# Altium PCB PCBControl.PcbDoc
Units mm, origin at the board's own origin, x right, y up, seen from the top; angles counter-clockwise.
Board outline 154.42 x 78.27 mm, 2 copper layers (Top Layer, Bottom Layer); 60 components, 54 nets, 169 pads, 0 vias.
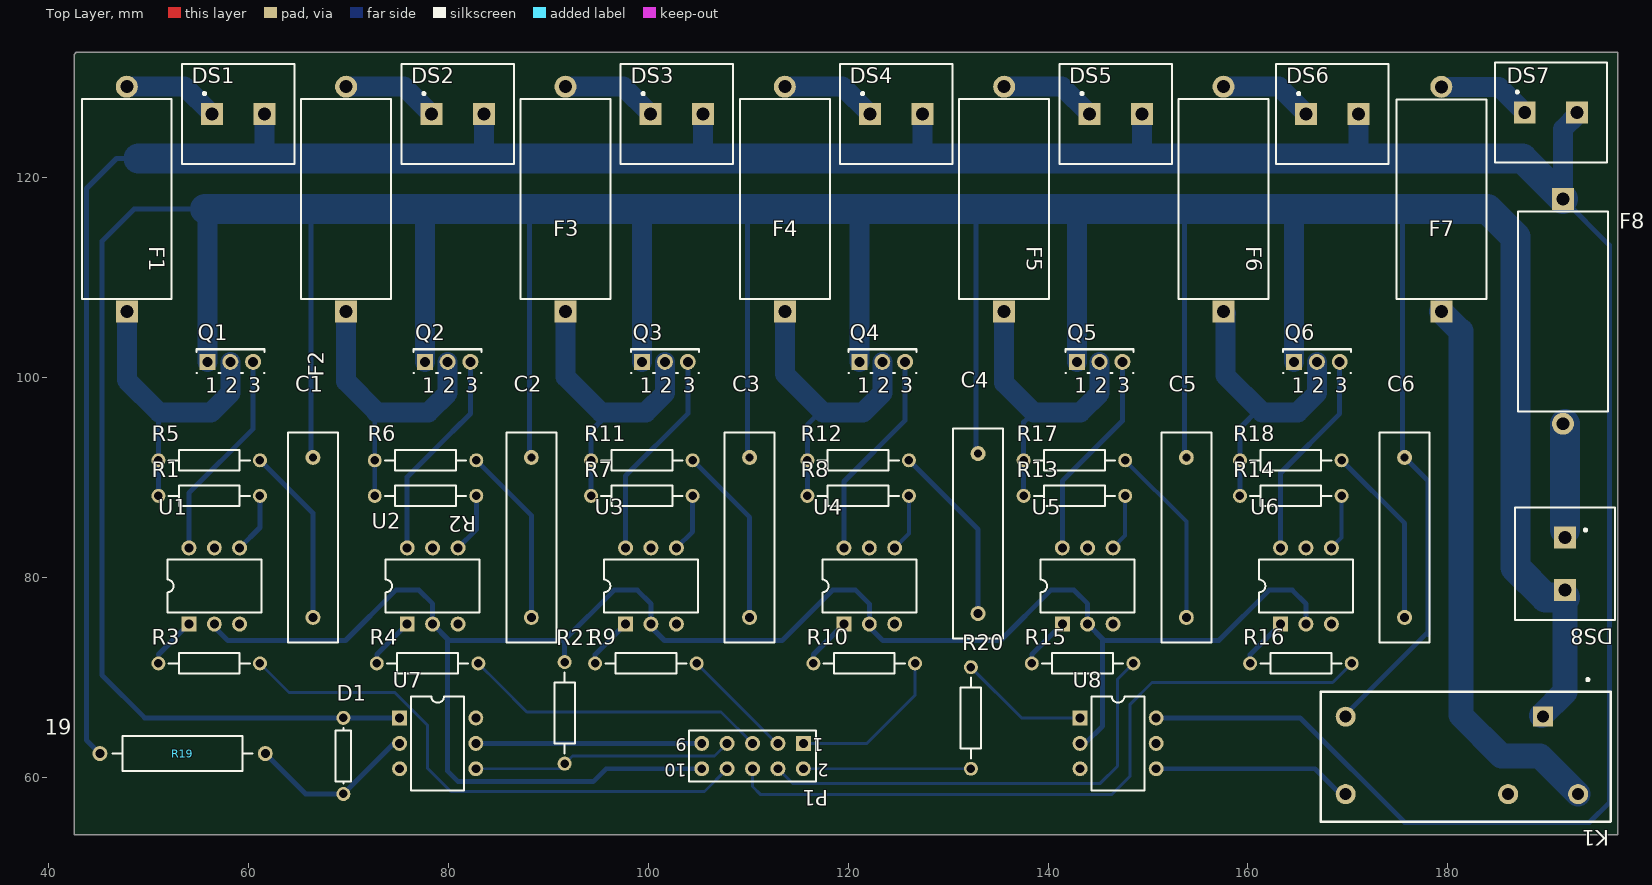
[diagram p0: Top Layer view]
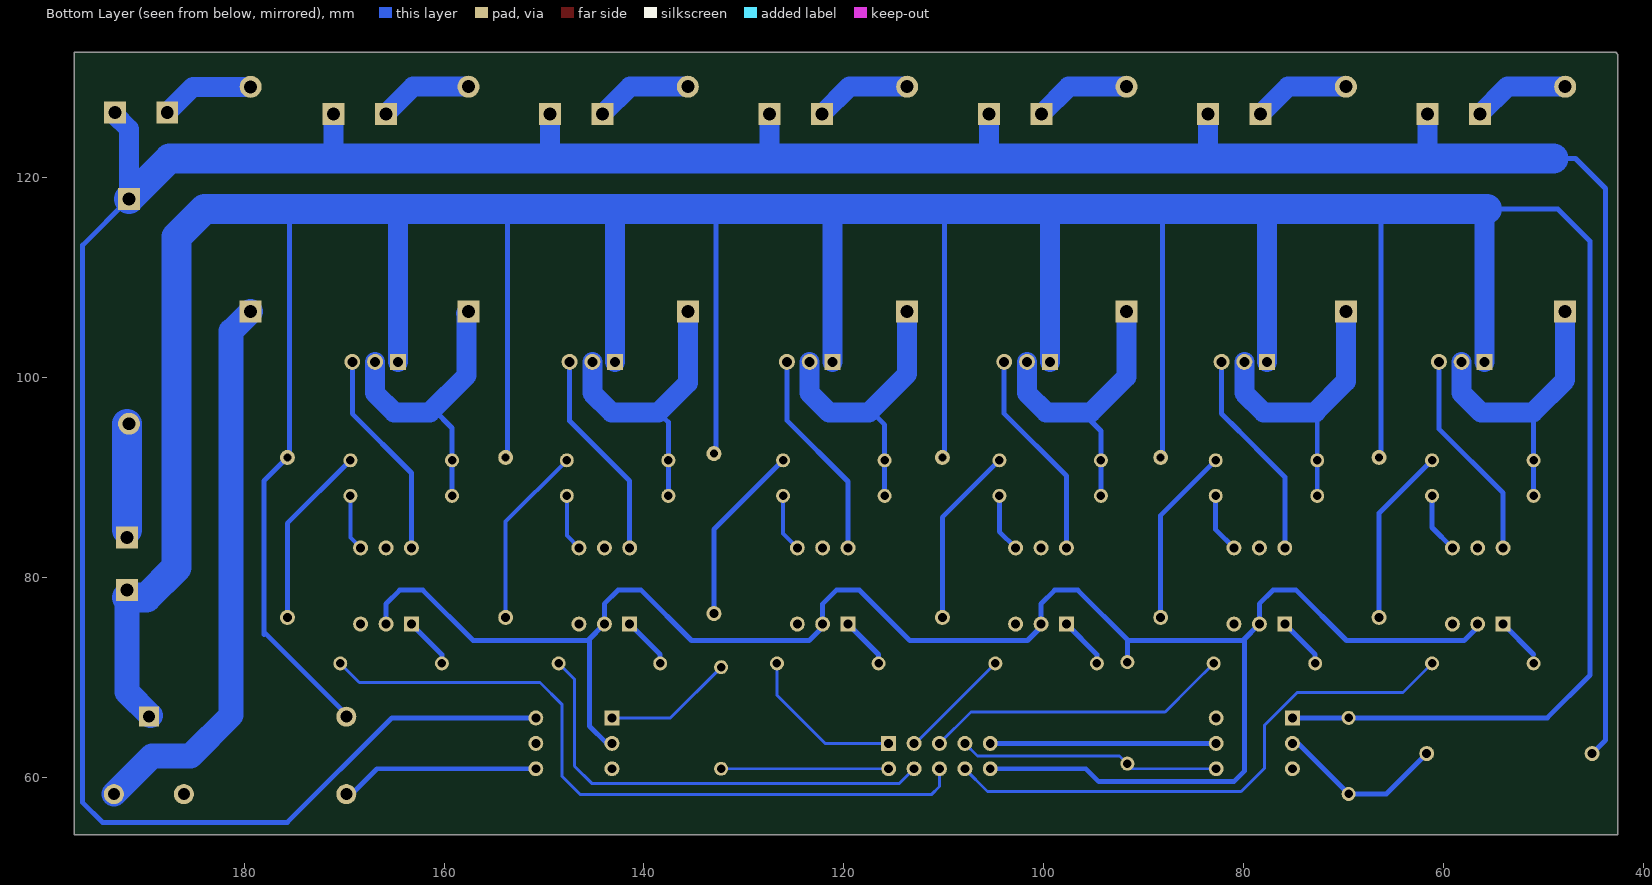
[diagram p1: Bottom Layer view, seen from below]

## Layer stack, top to bottom
Top Layer: signal copper 0.0356
Dielectric: dielectric 0.32, FR-4, Dk 4.8
Bottom Layer: signal copper 0.0356

## Board outline
42.575,132.3 42.575,54.25 197,54.25 197,132.525 42.775,132.525

## Design rules (kind name [scope] priority, off if disabled: settings)
Clearance [All] p1: gap=0.254
ComponentClearance [All] p1: gap=0.254 collisioncheckmode=3 verticalgap=0.254
PolygonConnect [All] p1: connectstyle=Relief reliefconductorwidth=0.254 reliefentries=4 polygonreliefangle="90 Angle"
RoutingVias [All] p1: holewidth=0.711 width=1.27 viastyle="Through Hole" minholewidth=0.711 minwidth=1.27 maxholewidth=1.25 maxwidth=2.5
SolderMaskExpansion [All] p1: expansion=0.102
TestPointUsage [All] p1: valid=0 allowmultiple=FALSE
Testpoint [All] p1: side=15 testpointundercomponent=TRUE minsize=1.016 maxsize=2.54 preferedsize=1.524 minholesize=0 maxholesize=1.016 preferedholesize=0.813 testpointgrid=0.025 style=1023 order=0-112345678
Width [All] p1: maxlimit=3 minlimit=0.254 preferedwidth=0.3 toplayer_minwidth=0.3 toplayer_prefwidth=0.5 bottomlayer_minwidth=0.3 bottomlayer_prefwidth=0.5 minimp=50.000000 maximp=50.000000 favimp=50.000000
18 further rules are at their usual default settings.

## Components (designator, comment, footprint, x,y, rotation, side; value= is the part's Value field where it differs from the comment)
C1 "Cap" RAD-0.3 66.458,91.984 r270 top
C2 "Cap" RAD-0.3 88.302,91.984 r270 top
C3 "Cap" RAD-0.3 110.146,91.984 r270 top
C4 "Cap" RAD-0.3 133.006,92.365 r270 top
C5 "Cap" RAD-0.3 153.834,91.984 r270 top
C6 "Cap" RAD-0.3 175.678,91.984 r270 top
D1 "Diode" AXIAL-0.3 69.5,62.125 r90 top
DS1 "Lamp Neon" PIN2 55.608,126.339 r0 top
DS2 "Lamp Neon" PIN2 77.554,126.339 r0 top
DS3 "Lamp Neon" PIN2 99.499,126.339 r0 top
DS4 "Lamp Neon" PIN2 121.445,126.339 r0 top
DS5 "Lamp Neon" PIN2 143.39,126.339 r0 top
DS6 "Lamp Neon" PIN2 165.082,126.339 r0 top
DS7 "Lamp Neon" PIN2 186.944,126.492 r0 top
DS8 "Lamp" PIN2 191.716,84.716 r270 top
F1 "Fuse 2" PIN-W2/E2.8 47.831,106.573 r90 top
F2 "Fuse 2" PIN-W2/E2.8 69.777,106.573 r90 top
F3 "Fuse 2" PIN-W2/E2.8 91.722,106.573 r90 top
F4 "Fuse 2" PIN-W2/E2.8 113.668,106.573 r90 top
F5 "Fuse 2" PIN-W2/E2.8 135.613,106.573 r90 top
F6 "Fuse 2" PIN-W2/E2.8 157.559,106.573 r90 top
F7 "Fuse 2" PIN-W2/E2.8 179.348,106.565 r90 top
F8 "Fuse 2" PIN-W2/E2.8 191.516,117.856 r270 top
K1 "Relay" MODULE5B 180.032,58.3 r180 top
P1 "Header 5X2" HDR2X5 115.516,63.38 r180 top
Q1 "Triac" 369-03 58.193,101.551 r0 top
Q2 "Triac" 369-03 79.935,101.551 r0 top
Q3 "Triac" 369-03 101.678,101.551 r0 top
Q4 "Triac" 369-03 123.42,101.551 r0 top
Q5 "Triac" 369-03 145.163,101.551 r0 top
Q6 "Triac" 369-03 166.905,101.551 r0 top
R1 "Res2" AXIAL-0.4 56.08,88.145 r180 top
R2 "Res2" AXIAL-0.4 77.721,88.145 r180 top
R3 "Res2" AXIAL-0.4 56.08,71.381 r180 top
R4 "Res2" AXIAL-0.4 77.924,71.381 r180 top
R5 "Res2" AXIAL-0.4 56.08,91.701 r180 top
R6 "Res2" AXIAL-0.4 77.721,91.701 r180 top
R7 "Res2" AXIAL-0.4 99.362,88.145 r180 top
R8 "Res2" AXIAL-0.4 121.002,88.145 r180 top
R9 "Res2" AXIAL-0.4 99.768,71.381 r180 top
R10 "Res2" AXIAL-0.4 121.612,71.381 r180 top
R11 "Res2" AXIAL-0.4 99.362,91.701 r180 top
R12 "Res2" AXIAL-0.4 121.002,91.701 r180 top
R13 "Res2" AXIAL-0.4 142.643,88.145 r180 top
R14 "Res2" AXIAL-0.4 164.284,88.145 r180 top
R15 "Res2" AXIAL-0.4 143.456,71.381 r180 top
R16 "Res2" AXIAL-0.4 165.3,71.381 r180 top
R17 "Res2" AXIAL-0.4 142.643,91.701 r180 top
R18 "Res2" AXIAL-0.4 164.284,91.701 r180 top
R19 "Res2" RESIS1W 43.888,62.364 r180 top
R20 "Res2" AXIAL-0.4 132.28,65.92 r90 top
R21 "Res2" AXIAL-0.4 91.64,66.428 r270 top
U1 "Opto TRIAC" DIP-6 56.588,79.128 r0 top
U2 "Opto TRIAC" DIP-6 78.432,79.128 r0 top
U3 "Opto TRIAC" DIP-6 100.276,79.128 r0 top
U4 "Opto TRIAC" DIP-6 122.12,79.128 r0 top
U5 "Opto TRIAC" DIP-6 143.964,79.128 r0 top
U6 "Opto TRIAC" DIP-6 165.808,79.128 r0 top
U7 "Optoisolator1" DIP-6 78.94,63.38 r270 top
U8 "Opto TRIAC" DIP-6 147.012,63.38 r270 top

## Footprints (in the part's own frame and the unit in brackets; to place one, negate y for a bottom-side part, rotate by r counter-clockwise, add the part's x,y. Pads: shape width x height; smd on the part's side, far side on the other; paste and mask are expansions set on the pad)
369-03 [mm] "TO, Thru-Hole, Vertical, Heatsink Mounted; 3 In-Line Leads; Pitch 2.28 mm"
  rect 1.6x1.6 hole 1: 1(-2.28,0)
  round 1.6 hole 1: 2(0,0) 3(2.28,0)
  silkscreen extent -3.4,-1.1 3.4,1.3
AXIAL-0.3 [mm] "Resistor; 2 Leads"
  round 1.4 hole 0.85: 1(-3.81,0) 2(3.81,0)
  silkscreen extent -2.77,-0.76 2.77,0.76
AXIAL-0.4 [mm] "Resistor; 2 Leads"
  round 1.4 hole 0.85: 1(-5.08,0) 2(5.08,0)
  silkscreen extent -4.06,-1.02 4.06,1.02
DIP-6 [mm] "DIP; 6 Leads; Row Spacing 7.62 mm; Pitch 2.54 mm"
  rect 1.5x1.5 hole 0.9: 1(-2.54,-3.81)
  round 1.5 hole 0.9: 2(0,-3.81) 3(2.54,-3.81) 4(2.54,3.81) 5(0,3.81) 6(-2.54,3.81)
  silkscreen extent -4.7,-2.65 4.7,2.65
HDR2X5 [mm] "Connector; Header; 5x2 Position"
  rect 1.5x1.5 hole 0.9: 1(0,0)
  round 1.5 hole 0.9: 2(0,2.54) 3(2.54,0) 4(2.54,2.54) 5(5.08,0) 6(5.08,2.54) 7(7.62,0) 8(7.62,2.54) 9(10.16,0) 10(10.16,2.54)
  silkscreen extent -1.27,-1.27 11.43,3.81
MODULE5B [mm] "DIP; 5 Round Pins; Row Space 15.24 mm; Pitch 2.54 mm"
  rect 2x2 hole 1.2: 1(-9.5,-7.75)
  round 2 hole 1.2: 2(-6,0) 3(-13,0) 4(10.25,0) 5(10.25,-7.75)
  silkscreen extent -16.25,-11.57 12.75,2.75
PIN2 [mm]
  rect 2.2x2.2 hole 1.3: 1(0.75,0) 2(6,0)
  silkscreen extent -2.25,-5 9,5
PIN-W2/E2.8 [mm] "Fuse; 2 Leads"
  rect 2.2x2.2 hole 1.3: 1(0,0)
  round 2.2 hole 1.3: 2(22.5,0)
  silkscreen extent 1.25,-4.5 21.25,4.5
RAD-0.3 [mm] "Capacitor; 2 Leads"
  round 1.5 hole 0.8: 1(0,0)
  round 1.5 hole 0.9: 2(16,0)
  silkscreen extent -2.5,-2.5 18.5,2.5
RESIS1W [mm]
  round 1.5 hole 0.9: 1(-17.8,0) 2(-1.25,0)
  silkscreen extent -16.5,-1.75 -2.5,1.75

## Part data
C1 C2 C3 C4 C5 C6: "Capacitor"
D1: "Default Diode"
DS1 DS2 DS3 DS4 DS5 DS6 DS7: "Neon Lamp"
DS8: "Incandescent Bulb"
F1 F2 F3 F4 F5 F6 F7 F8: "Fuse"
K1: "SPDT Relay"
P1: "Header, 5-Pin, Dual row"
Q1 Q2 Q3 Q4 Q5 Q6: "Silicon Bidirectional Triode Thyristor"
R1 R2 R3 R4 R5 R6 R7 R8 R9 R10 R11 R12 R13 R14 R15 R16 R17 R18 R19 R20 R21: "Resistor"
U1 U2 U3 U4 U5 U6 U8: "Opto-Triac"
U7: "4-Pin Phototransistor Optocoupler"

## Nets (pads, with @x,y where several pads share a name; then routed paths per layer and width w, separated by ;. In a path a pad name is that pad's centre, name@x,y a point inside that pad or via, vN(x,y) a via of type N, cw(c..) or ccw(c..) an arc to the next point about the centre after c; other vN are vias at no path point)
DETFASE: P1.7 R21.2 U7.4 | length 25.5
  Bottom Layer w0.3: U7.4 91.132,60.84 ; R21.2 92.417,62.125 106.641,62.125 P1.7
FASE: DS1.2 DS2.2 DS3.2 DS4.2 DS5.2 DS6.2 DS7.2 F8.1 R19.2 U8.6 | length 355.6
  Bottom Layer w0.5: R19.2 43.8,63.702 43.8,118.9 46.8,121.9 49,121.9 ; U8.6 165.23,65.92 175.675,55.475 194.175,55.475 196.15,57.45 196.15,113.222 F8.1
  Bottom Layer w2: 61.608,121.933 DS1.2 ; 83.525,121.9 83.554,121.929 DS2.2 ; 105.499,122.026 DS3.2 ; 127.445,122.03 DS4.2 ; 149.39,122.065 DS5.2 ; 171.082,122.018 DS6.2 ; F8.1 191.516,124.841 DS7.2@192.95,126.275
  Bottom Layer w3: 49,121.9 187.472,121.9 F8.1
GND: P1.10 R21.1 U1.2 U2.2 U3.2 U4.2 U5.2 U6.2 U8.2 | length 188.5
  Bottom Layer w0.5: U1.2@56.588,75.03 57.943,73.675 69.718,73.675 74.743,78.7 77.068,78.7 78.432,77.336 U2.2 80.075,73.675 91.562,73.675 96.587,78.7 98.912,78.7 100.276,77.336 U3.2 ; 79.9,73.85 79.9,60.625 80.979,59.546 94.496,59.546 95.79,60.84 P1.10 ; R21.1 91.64,73.597 ; U3.2@100.276,75.03 101.631,73.675 113.406,73.675 118.431,78.7 120.756,78.7 122.12,77.336 U4.2 ; U4.2@122.12,75.03 123.475,73.675 135.25,73.675 140.275,78.7 142.6,78.7 143.964,77.336 U5.2 145.607,73.675 157.094,73.675 162.119,78.7 164.444,78.7 165.808,77.336 U6.2 ; U8.2@143.73,63.38 145.45,65.1 145.45,73.832
NetC1_2: C1.2 R5.1 | length 17.9
  Bottom Layer w0.5: R5.1 66.458,86.403 C1.2
NetC2_2: C2.2 R6.1 | length 18
  Bottom Layer w0.5: R6.1 88.302,86.2 C2.2
NetC3_2: C3.2 R11.1 | length 18.1
  Bottom Layer w0.5: R11.1 110.146,85.997 C3.2
NetC4_2: C4.2 R12.1 | length 18.3
  Bottom Layer w0.4: R12.1@125.93,91.955 R12.1@126.057,91.955
  Bottom Layer w0.5: R12.1 133.006,84.777 C4.2
NetC5_2: C5.2 R17.1 | length 18.2
  Bottom Layer w0.4: R17.1 153.834,85.59 C5.2
NetC6_2: C6.2 R18.1 | length 18.3
  Bottom Layer w0.5: R18.1 175.678,85.387 C6.2
NetD1_1: D1.1 R19.1 U7.2 | length 17.2
  Bottom Layer w0.5: R19.1 65.737,58.315 D1.1 74.565,63.38 U7.2
NetDS1_1: DS1.1 F1.2 | length 9.7
  Bottom Layer w2: F1.2 53.624,129.073 DS1.1
NetDS2_1: DS2.1 F2.2 | length 9.7
  Bottom Layer w2: F2.2 75.57,129.073 DS2.1
NetDS3_1: DS3.1 F3.2 | length 9.6
  Bottom Layer w2: F3.2 97.515,129.073 DS3.1@100.188,126.4
NetDS4_1: DS4.1 F4.2 | length 9.7
  Bottom Layer w2: F4.2 119.461,129.073 DS4.1
NetDS5_1: DS5.1 F5.2 | length 9.7
  Bottom Layer w2: F5.2 141.406,129.073 DS5.1
NetDS6_1: DS6.1 F6.2 | length 9.4
  Bottom Layer w2: F6.2 163.098,129.073 DS6.1
NetDS7_1: DS7.1 F7.2 | length 9.4
  Bottom Layer w2: F7.2 185.121,129.065 DS7.1
NetDS8_1: DS8.1 F8.2 | length 10.6
  Bottom Layer w3: DS8.1@191.716,84.716 F8.2@191.716,95.356
NetF1_1: F1.1 Q1.2 R1.2 R5.2 | length 30.9
  Bottom Layer w0.5: R1.2 51,96.55
  Bottom Layer w2: F1.1 47.831,99.719 51.05,96.5 56.275,96.5 58.193,98.418 Q1.2
NetF2_1: F2.1 Q2.2 R2.2 R6.2 | length 31
  Bottom Layer w0.5: 72.641,96.348 R2.2@72.641,88.196 ; R2.2@72.641,88.196 72.463,88.018 72.615,88.17 R2.2@72.641,88.196
  Bottom Layer w2: F2.1 69.777,99.598 72.792,96.583 ; 72.751,96.541 72.792,96.5 78.017,96.5 79.935,98.418 Q2.2
NetF3_1: F3.1 Q3.2 R7.2 R11.2 | length 30.8
  Bottom Layer w0.5: R7.2 94.282,94.632 95.625,95.975 95.625,96.5
  Bottom Layer w2: F3.1 91.722,100.053 95.275,96.5 99.76,96.5 101.678,98.418 Q3.2
NetF4_1: F4.1 Q4.2 R8.2 R12.2 | length 30.6
  Bottom Layer w0.5: R8.2 115.922,95.249 117.337,96.663
  Bottom Layer w2: F4.1 113.668,100.332 117.337,96.663 117.5,96.5 121.502,96.5 123.42,98.418 Q4.2
NetF5_1: F5.1 Q5.2 R13.2 R17.2 | length 30.6
  Bottom Layer w0.5: R13.2 137.563,95.513 138.55,96.5
  Bottom Layer w2: F5.1 135.613,99.437 138.55,96.5 143.245,96.5 145.163,98.418 Q5.2
NetF6_1: F6.1 Q6.2 R14.2 R18.2 | length 30.4
  Bottom Layer w0.5: R14.2 159.204,94.935 161.097,96.828
  Bottom Layer w2: F6.1@157.8,106.4 157.732,106.4 157.732,100.193 161.425,96.5 164.987,96.5 166.905,98.418 Q6.2
NetF7_1: F7.1 K1.3 | length 56.2
  Bottom Layer w2.5: F7.1 181.3,104.613 181.3,66.2 185.375,62.125 189.207,62.125 K1.3
NetK1_4: K1.4 U8.4 | length 20.2
  Bottom Layer w0.5: U8.4 166.71,60.84 K1.4@169.766,57.784
NetQ1_3: Q1.3 U1.6 | length 21.3
  Bottom Layer w0.5: U1.6 54.048,88.425 60.473,94.85 Q1.3
NetQ2_3: Q2.3 U2.6 | length 23.1
  Bottom Layer w0.5: U2.6 75.892,90.037 81.753,95.898 ; 80.427,94.572 82.215,96.36 Q2.3
NetQ3_3: Q3.3 U3.6 | length 21.2
  Bottom Layer w0.5: U3.6 97.736,90.138 103.958,96.36 Q3.3
NetQ4_3: Q4.3 U4.6 | length 21.7
  Bottom Layer w0.5: U4.6@119.525,83.178 119.765,82.938 119.673,83.031 U4.6@119.58,83.123 ; U4.6 119.58,89.575 125.7,95.695 Q4.3
NetQ5_3: Q5.3 U5.6 | length 21.1
  Bottom Layer w0.5: U5.6 141.424,89.624 147.443,95.643 Q5.3
NetQ6_3: Q6.3 U6.6 | length 21.1
  Bottom Layer w0.5: U6.6@163.25,82.938 163.25,90.425 169.185,96.36 Q6.3
NetR1_1: R1.1 U1.4 | length 6
  Bottom Layer w0.5: U1.4 61.16,84.97 R1.1
NetR2_1: R2.1 U2.4 | length 6
  Bottom Layer w0.5: U2.4 82.801,84.767 R2.1
NetR3_2: R3.2 U1.1 | length 4.3
  Bottom Layer w0.5: 51,72.27 U1.1
NetR4_2: R4.2 U2.1 | length 5.2
  Bottom Layer w0.5: R4.2 72.844,72.27 U2.1
NetR7_1: R7.1 U3.4 | length 5.9
  Bottom Layer w0.5: U3.4 104.442,84.564 R7.1
NetR8_1: R8.1 U4.4 | length 5.8
  Bottom Layer w0.4: U4.4 126.082,84.36 R8.1
NetR9_2: R9.2 U3.1 | length 5.2
  Bottom Layer w0.5: R9.2 94.688,72.27 U3.1
NetR10_2: R10.2 U4.1 | length 5.2
  Bottom Layer w0.5: R10.2 116.532,72.27 U4.1
NetR13_1: R13.1 U5.4 | length 5.7
  Bottom Layer w0.4: U5.4 147.723,84.157 R13.1
NetR14_1: R14.1 U6.4 | length 5.6
  Bottom Layer w0.4: U6.4 169.364,83.954 R14.1
NetR15_2: R15.2 U5.1 | length 5.2
  Bottom Layer w0.5: R15.2 138.376,72.27 U5.1
NetR16_2: R16.2 U6.1 | length 5.2
  Bottom Layer w0.5: R16.2 160.22,72.27 U6.1
NetR20_2: R20.2 U8.1 | length 13
  Bottom Layer w0.3: R20.2 137.36,65.92 U8.1
NEUTRO: C1.1 C2.1 C3.1 C4.1 C5.1 C6.1 D1.2 DS8.2 K1.1 K1.5 Q1.1 Q2.1 Q3.1 Q4.1 Q5.1 Q6.1 U7.1 | length 539.2
  Bottom Layer w0.5: 55.65,116.825 48.55,116.825 45.35,113.625 45.35,70.2 49.615,65.935 U7.1@75.115,65.935 ; C1.1@66.258,91.984 66.258,116.592 ; 88.102,116.627 88.102,92.184 C2.1 ; C3.1@109.946,92.184 109.946,116.754 ; C4.1@132.806,92.565 132.806,116.694 ; C5.1@153.634,91.984 153.634,116.809 ; K1.5@169.782,66.3 178.025,74.543 ; C6.1@175.478,91.984 175.478,116.628 ; C6.1 178.025,89.637 178.025,74.275
  Bottom Layer w2: Q1.1 55.913,116.787 ; Q2.1 77.655,117.005 ; Q3.1 99.398,116.677 ; Q4.1 121.14,116.51 ; Q5.1 142.883,115.917 ; Q6.1 164.625,116.85
  Bottom Layer w2.5: K1.1@189.35,66.15 191.716,68.516 DS8.2@191.716,77.966
  Bottom Layer w3: 55.65,116.825 183.989,116.825 186.75,114.064 186.75,80.991 189.775,77.966 DS8.2@191.716,77.966
RELE: P1.2 R20.1 | length 16.8
  Bottom Layer w0.3: P1.2 R20.1
TRIAC1: P1.8 R3.1 | length 55.5
  Bottom Layer w0.3: R3.1 64.066,68.475 74.65,68.475 77.9,65.225 77.9,60.925 80.25,58.575 105.631,58.575 P1.8
TRIAC2: P1.3 R9.1 | length 11.5
  Bottom Layer w0.3: R9.1 P1.3@112.976,63.253
TRIAC3: P1.4 R15.1 | length 46.2
  Bottom Layer w0.3: P1.4 114.429,59.387 145.237,59.387 146.95,61.1 146.95,69.795 R15.1
TRIAC4: P1.5 R4.1 | length 30.7
  Bottom Layer w0.3: R4.1 85.11,69.275 87.86,66.525 107.291,66.525 P1.5
TRIAC5: P1.1 R10.1 | length 16.4
  Bottom Layer w0.3: P1.1 121.88,63.38 126.692,68.192 R10.1
TRIAC6: P1.6 R16.1 | length 71.7
  Bottom Layer w0.3: P1.6 110.436,59.064 111.25,58.25 146.35,58.25 148.225,60.125 148.225,67.3 150.4,69.475 168.474,69.475 R16.1
VCC: P1.9 U7.5 | length 22.6
  Bottom Layer w0.5: U7.5 P1.9
pads on no net: K1.2 U1.3 U1.5 U2.3 U2.5 U3.3 U3.5 U4.3 U4.5 U5.3 U5.5 U6.3 U6.5 U7.3 U7.6 U8.3 U8.5

## Text inside footprints (layer, text, board x,y; h text height)
P1: Top Overlay "10" at 103.832,61.348 h1.27 r180; Top Overlay "9" at 103.832,63.888 h1.27 r180; Top Overlay "1" at 117.548,63.888 h1.27 r180; Top Overlay "2" at 118.056,61.348 h1.27 r180
Q1: Top Overlay "3" at 59.973,98.476 h1.5; Top Overlay "2" at 57.693,98.476 h1.5; Top Overlay "1" at 55.663,98.476 h1.5
Q2: Top Overlay "3" at 81.715,98.476 h1.5; Top Overlay "2" at 79.435,98.476 h1.5; Top Overlay "1" at 77.405,98.476 h1.5
Q3: Top Overlay "3" at 103.458,98.476 h1.5; Top Overlay "2" at 101.178,98.476 h1.5; Top Overlay "1" at 99.148,98.476 h1.5
Q4: Top Overlay "3" at 125.2,98.476 h1.5; Top Overlay "2" at 122.92,98.476 h1.5; Top Overlay "1" at 120.89,98.476 h1.5
Q5: Top Overlay "3" at 146.943,98.476 h1.5; Top Overlay "2" at 144.663,98.476 h1.5; Top Overlay "1" at 142.633,98.476 h1.5
Q6: Top Overlay "3" at 168.685,98.476 h1.5; Top Overlay "2" at 166.405,98.476 h1.5; Top Overlay "1" at 164.375,98.476 h1.5